# Altium PCB PCB_Decimal Display_2021-10-08.pcbdoc
Units mm, origin at the board's own origin, x right, y up, seen from the top; angles counter-clockwise.
Board outline 124.59 x 83.95 mm, 2 copper layers (Top Layer, Bottom Layer); 16 components, 42 nets, 109 pads, 14 vias.
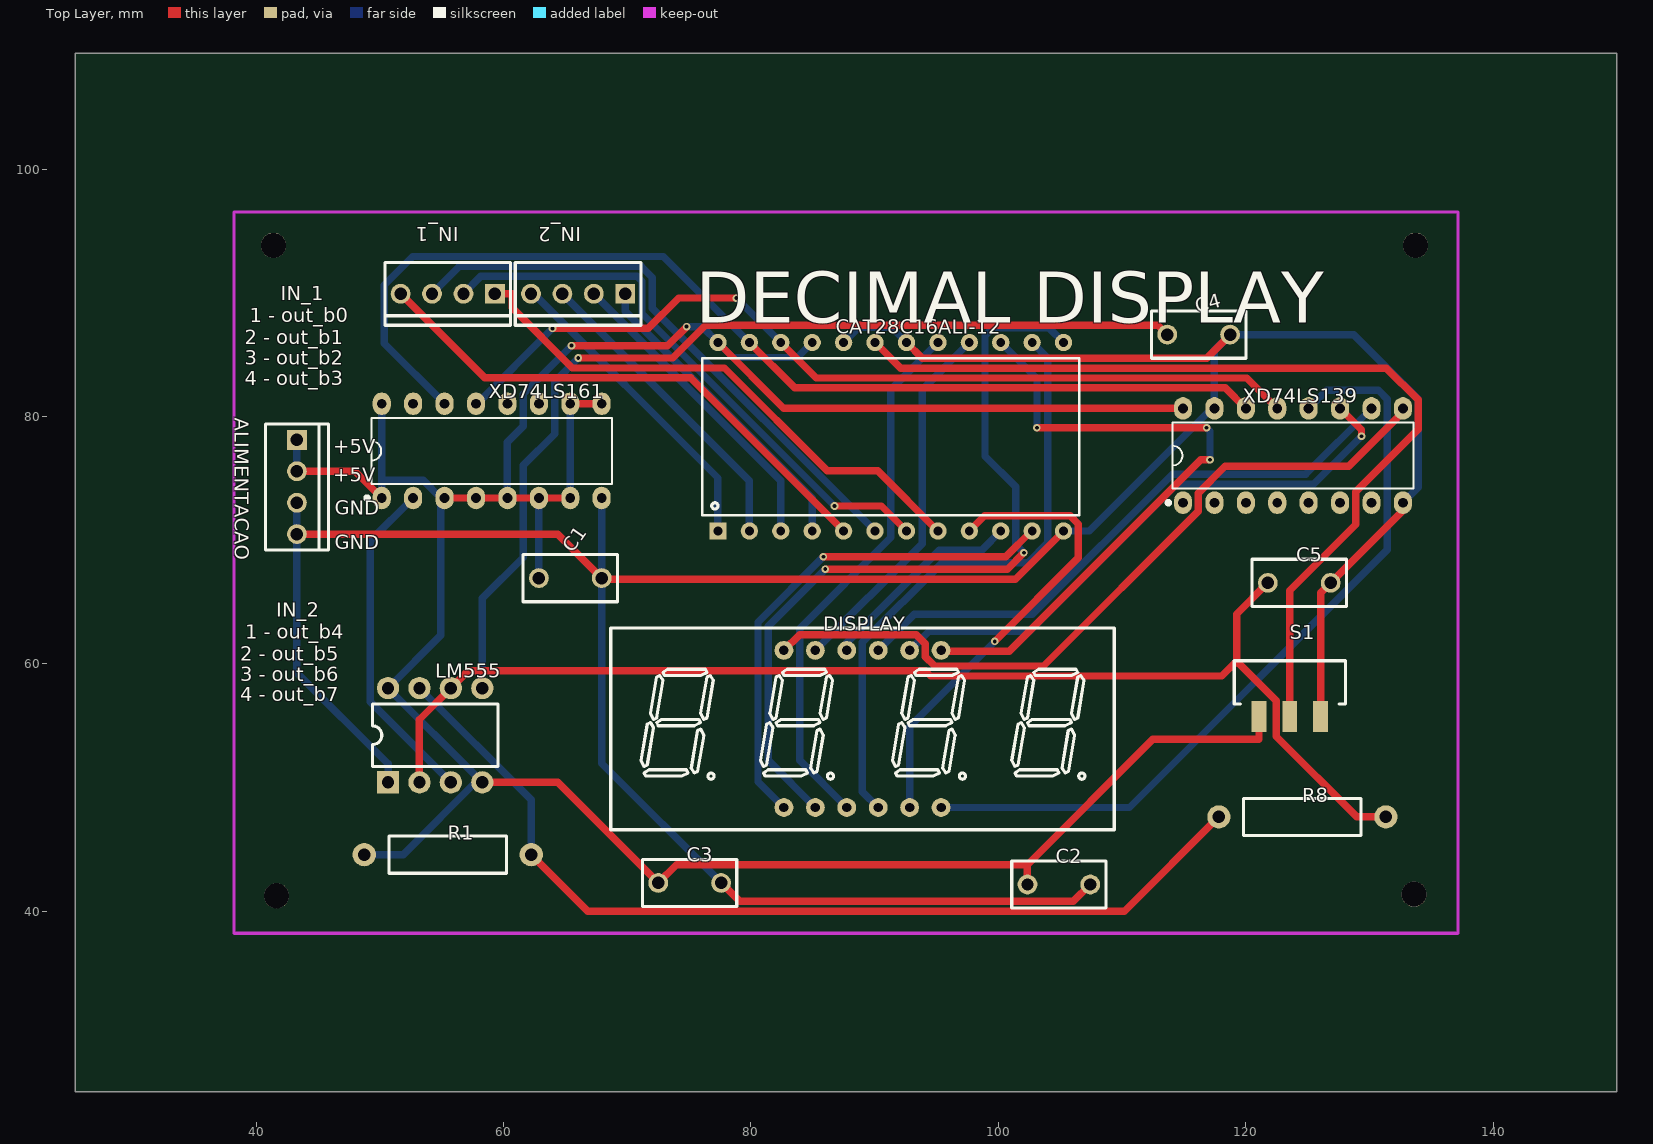
[diagram p0: Top Layer view]
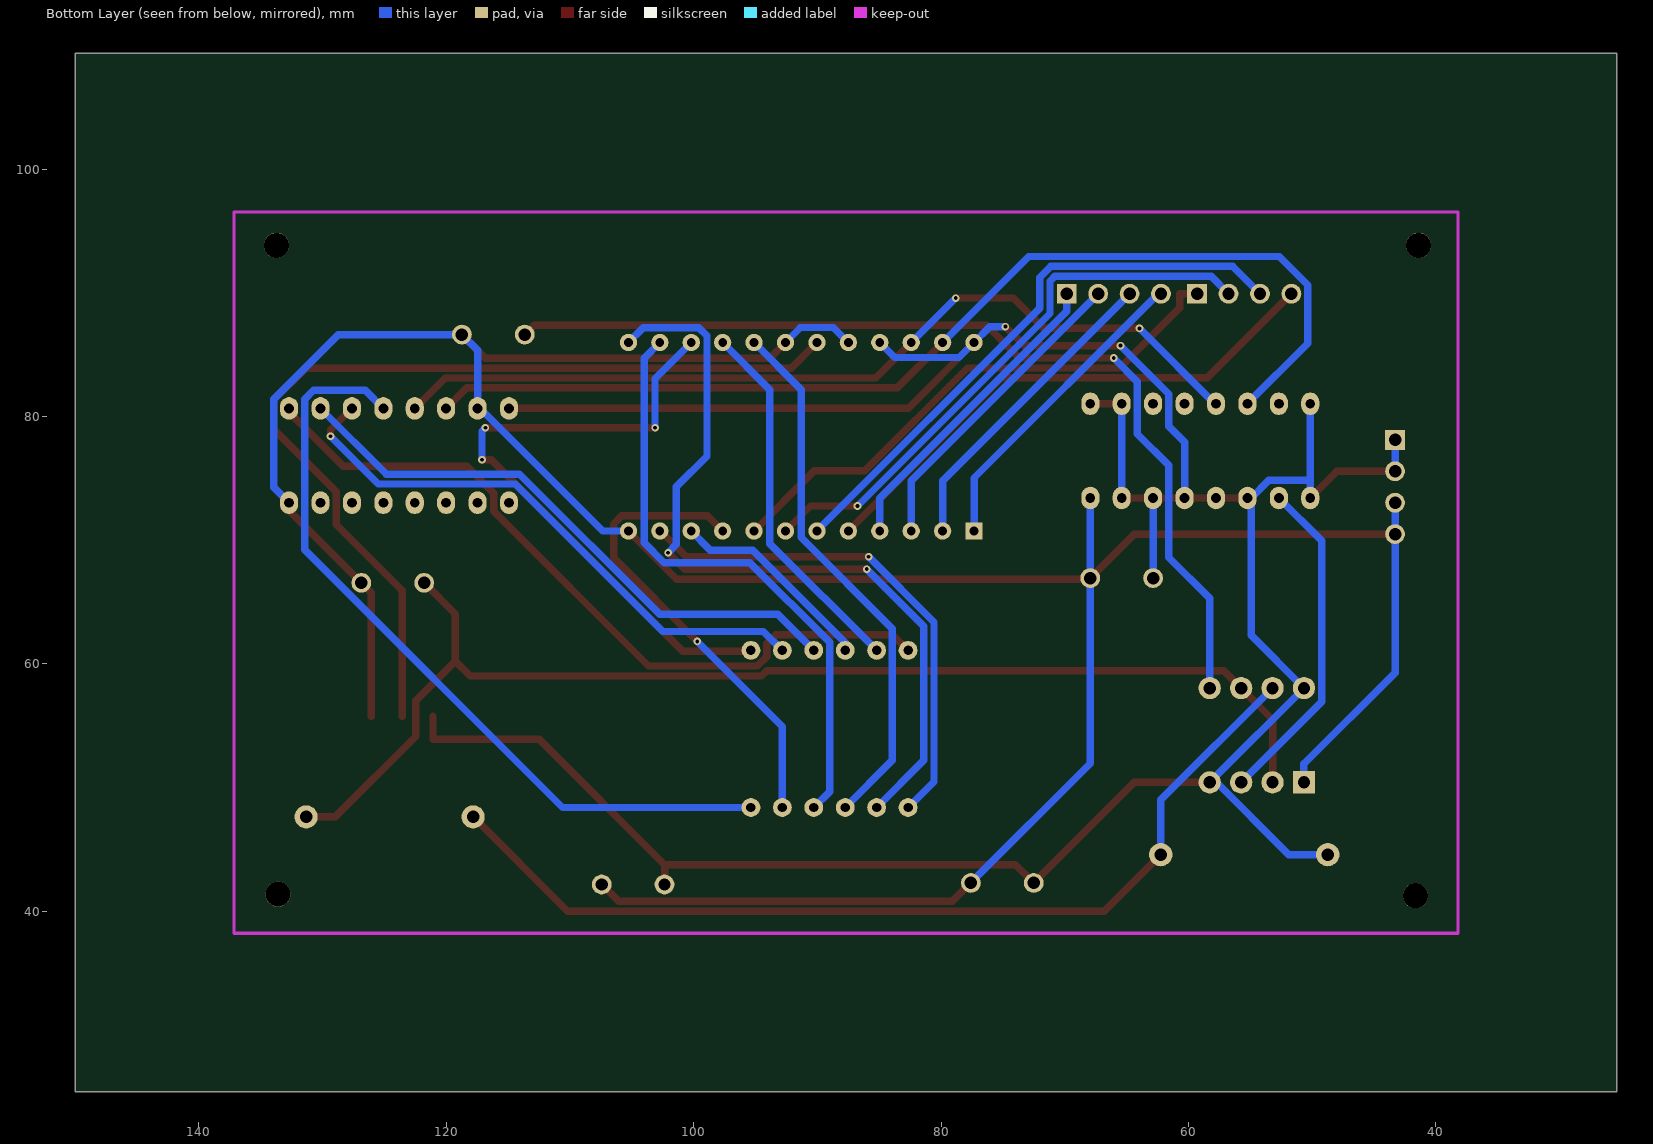
[diagram p1: Bottom Layer view, seen from below]

## Layer stack, top to bottom
Top Layer: signal copper (thickness not stored)
Dielectric: dielectric 0.32, FR-4, Dk 4.8
Bottom Layer: signal copper (thickness not stored)

## Board outline
149.987,25.4 25.4,25.4 25.4,109.347 149.987,109.347

## Components (designator, comment, footprint, x,y, rotation, side; value= is the part's Value field where it differs from the comment)
ALIMENTACAO "ALIM." HDR-TH_4P-P2.54-D1.0 43.307,74.295 r270 top
C1 "100nF 63V poli7" CAP-TH_L7.6-W3.8-P5.08-D0.51 65.405,66.929 r0 top
C2 "100nF 63V poli" CAP-TH_L7.6-W3.8-P5.08-D0.51 104.902,42.164 r0 top
C3 "100nF 63V poli" CAP-TH_L7.6-W3.8-P5.08-D0.51 75.057,42.291 r0 top
C4 "10nF 50V cera" CAP-TH_L7.6-W3.8-P5.08-D0.51 116.205,86.614 r0 top
C5 "15nF 63V poli" CAP-TH_L7.6-W3.8-P5.08-D0.51 124.333,66.548 r0 top
CAT28C16ALI-12 "CAT28C16ALI-12" DIP24-600 91.313,78.359 r0 top
DISPLAY "FJ4401BH" LED-SEG-TH_12P-L40.4-W16.0-P2.54-S12.70-BL 89.027,54.737 r0 top
IN_1 "OUT1" HDR-TH_4P-P2.54-D1.0 55.499,89.916 r180 top
IN_2 "OUT2" HDR-TH_4P-P2.54-D1.0 66.04,89.916 r180 top
LM555 "LM555CN" DIP-8_L9.7-W6.4-P2.54-LS7.6-BL 54.483,54.229 r0 top
R1 "1k" RES-TH_BD3.0-L9.5-P13.50-D0.6 55.499,44.577 r0 top
R8 "100k" RES-TH_BD3.0-L9.5-P13.50-D0.6 124.587,47.625 r0 top
S1 "SWITCH-SPDT" SWITCH-SPDT-SMD 123.571,55.753 r0 top
XD74LS139 "XD74LS139" DIP-16_L19.2-W6.6-P2.54-LS7.6-BL 123.825,76.835 r0 top
XD74LS161 "XD74LS161" DIP-16_L19.2-W6.6-P2.54-LS7.6-BL 59.055,77.216 r0 top

## Footprints (in the part's own frame and the unit in brackets; to place one, negate y for a bottom-side part, rotate by r counter-clockwise, add the part's x,y. Pads: shape width x height; smd on the part's side, far side on the other; paste and mask are expansions set on the pad)
CAP-TH_L7.6-W3.8-P5.08-D0.51 [mm]
  round 1.6 hole 1: 1(-2.54,0) 2(2.54,0)
  silkscreen extent -3.81,-1.91 3.81,1.91
DIP24-600 [mil]
  rect 55x55 hole 28: 1(-550,-300)
  round 55 hole 28: 2(-450,-300) 3(-350,-300) 4(-250,-300) 5(-150,-300) 6(-50,-300) 7(50,-300) 8(150,-300) 9(250,-300) 10(350,-300) 11(450,-300) 12(550,-300) 13(550,300) 14(450,300) 15(350,300) 16(250,300) 17(150,300) 18(50,300) 19(-50,300) 20(-150,300) 21(-250,300) 22(-350,300) 23(-450,300) 24(-550,300)
  silkscreen extent -600,-250 600,250
DIP-8_L9.7-W6.4-P2.54-LS7.6-BL [mm]
  rect 1.8x1.8 hole 1: 1(-3.81,-3.81)
  round 1.8 hole 1: 2(-1.27,-3.81) 3(1.27,-3.81) 4(3.81,-3.81) 5(3.81,3.81) 6(1.27,3.81) 7(-1.27,3.81) 8(-3.81,3.81)
  silkscreen extent -5.08,-2.53 5.08,2.53
DIP-16_L19.2-W6.6-P2.54-LS7.6-BL [mm]
  oval 1.46x1.825 hole 0.8: 1(-8.89,-3.81) 2(-6.35,-3.81) 3(-3.81,-3.81) 4(-1.27,-3.81) 5(1.27,-3.81) 6(3.81,-3.81) 7(6.35,-3.81) 8(8.89,-3.81) 9(8.89,3.81) 10(6.35,3.81) 11(3.81,3.81) 12(1.27,3.81) 13(-1.27,3.81) 14(-3.81,3.81) 15(-6.35,3.81) 16(-8.89,3.81)
  silkscreen extent -10.22,-3.96 9.73,2.67
HDR-TH_4P-P2.54-D1.0 [mm]
  rect 1.6x1.6 hole 1: 1(-3.81,0)
  round 1.6 hole 1: 2(-1.27,0) 3(1.27,0) 4(3.81,0)
  silkscreen extent -5.08,-2.54 5.08,2.54
LED-SEG-TH_12P-L40.4-W16.0-P2.54-S12.70-BL [mil]
  round 60 hole 30: 1(-250,-250) 2(-150,-250) 3(-50,-250) 4(50,-250) 5(150,-250) 6(250,-250) 7(250,250) 8(150,250) 9(50,250) 10(-50,250) 11(-150,250) 12(-250,250)
  silkscreen extent -801,-321 801,321
RES-TH_BD3.0-L9.5-P13.50-D0.6 [mm]
  round 1.88 hole 1: 1(-6.75,0) 2(6.75,0)
  silkscreen extent -4.75,-1.5 4.75,1.5
SWITCH-SPDT-SMD [mil]
  rect 47.2x98.4 smd: 1(-98,0) 2(0,0) 3(98,0)
  silkscreen extent -177,39 177,177

## Free pads (board coordinates)
  round 2.032 hole 2.032 unplated: ""(41.408,93.831) ""(41.662,41.253) ""(133.61,41.38) ""(133.737,93.831)

## Via types
v1: diameter 0.61, hole 0.305, Top Layer to Bottom Layer, 14 vias

## Nets (pads, with @x,y where several pads share a name; then routed paths per layer and width w, separated by ;. In a path a pad name is that pad's centre, name@x,y a point inside that pad or via, vN(x,y) a via of type N, cw(c..) or ccw(c..) an arc to the next point about the centre after c; other vN are vias at no path point)
+5V: ALIMENTACAO.1 ALIMENTACAO.2 C1.1 C2.1 C3.1 CAT28C16ALI-12.21 CAT28C16ALI-12.24 LM555.4 LM555.8 R1.1 S1.1 XD74LS139.16 XD74LS161.1 XD74LS161.3 XD74LS161.4 XD74LS161.5 XD74LS161.6 XD74LS161.7 XD74LS161.9 XD74LS161.10 XD74LS161.16 | length 240.4
  Top Layer w0.6: ALIMENTACAO.2 48.006,75.565 XD74LS161.1 ; XD74LS161.3 XD74LS161.4 XD74LS161.5 XD74LS161.6 XD74LS161.7 ; LM555.4 64.389,50.419 C3.1 73.989,43.763 102.362,43.763 ; XD74LS161.10 XD74LS161.9 ; v1(65.503,85.724) 73.267,85.724 v1(74.808,87.264) ; CAT28C16ALI-12.24 82.677,80.645 XD74LS139.16 ; C2.1 102.362,43.763 ; S1.1 121.082,53.902 112.501,53.902 102.362,43.763
  Bottom Layer w0.6: ALIMENTACAO.2 ALIMENTACAO.1 ; R1.1@48.749,44.577 51.895,44.577 LM555.4@58.012,50.694 ; XD74LS161.1 50.165,74.835 ; XD74LS161.16 50.165,74.835 ; XD74LS161.3 XD74LS161.3@54.949,73.406 ; LM555.4 58.018,50.694 LM555.4@58.012,50.694 ; XD74LS161.5 60.325,77.923 61.595,79.193 61.595,81.815 v1(65.503,85.724) ; C1.1 XD74LS161.6 ; XD74LS161.7 XD74LS161.10 ; v1(74.808,87.264) 76.058,87.264 CAT28C16ALI-12.24 78.559,84.763 83.747,84.763 CAT28C16ALI-12.21 ; 50.165,74.835 53.521,74.835 XD74LS161.3@54.949,73.406 ; XD74LS161.3@54.949,73.406 54.949,62.315 LM555.8 58.012,50.7 LM555.4@58.012,50.694
GND: ALIMENTACAO.3 ALIMENTACAO.4 C1.2 C2.2 C3.2 C4.2 C5.2 CAT28C16ALI-12.12 CAT28C16ALI-12.18 CAT28C16ALI-12.20 LM555.1 S1.3 XD74LS139.8 XD74LS139.15 XD74LS161.8 | length 259.5
  Top Layer w0.6: ALIMENTACAO.4 64.389,70.485 C1.2 68.021,66.853 101.397,66.853 CAT28C16ALI-12.12 ; C3.2 79.092,40.796 106.074,40.796 C2.2 ; CAT28C16ALI-12.18 93.849,84.713 116.844,84.713 C4.2 ; S1.3 126.06,65.735 C5.2 132.715,72.39 XD74LS139.8
  Bottom Layer w0.6: ALIMENTACAO.3 ALIMENTACAO.4 43.307,59.286 50.673,51.92 LM555.1 ; XD74LS161.8 C1.2 67.945,51.943 C3.2 ; CAT28C16ALI-12.20 88.711,87.187 91.375,87.187 CAT28C16ALI-12.18 ; CAT28C16ALI-12.12 107.347,70.739 117.253,80.645 XD74LS139.15 117.475,85.344 C4.2 128.749,86.614 133.966,81.397 133.966,74.276 XD74LS139.8
LED1_6: DISPLAY.6 XD74LS139.12 | length 64.1
  Bottom Layer w0.6: DISPLAY.6 110.613,48.387 131.445,69.219 131.445,81.402 130.741,82.105 126.555,82.105 XD74LS139.12
LED1_8: DISPLAY.8 XD74LS139.11 | length 46.7
  Top Layer w0.6: XD74LS139.11 129.366,78.914 v1(129.366,78.407)
  Bottom Layer w0.6: DISPLAY.8 94.367,62.617 102.502,62.617 114.425,74.54 125.499,74.54 v1(129.366,78.407)
LED1_9: DISPLAY.9 XD74LS139.10 | length 48
  Bottom Layer w0.6: DISPLAY.9 93.217,64.007 102.757,64.007 114.092,75.343 124.873,75.343 XD74LS139.10
LED1_12: DISPLAY.12 XD74LS139.9 | length 61.9
  Top Layer w0.6: DISPLAY.12 83.941,62.351 93.373,62.351 94.113,61.611 94.113,60.564 94.854,59.823 103.658,59.823 116.167,72.332 116.167,73.803 118.335,75.971 128.336,75.971 132.715,80.351 XD74LS139.9
S$31: 
S$33: 
S$35: 
U1_1: CAT28C16ALI-12.1 IN_2.4 | length 25.6
  Bottom Layer w0.6: IN_2.4 62.453,89.916 77.343,75.026 CAT28C16ALI-12.1
U1_2: CAT28C16ALI-12.2 IN_2.3 | length 25.4
  Bottom Layer w0.6: IN_2.3 79.883,74.803 CAT28C16ALI-12.2
U1_3: CAT28C16ALI-12.3 IN_2.2 | length 25.4
  Bottom Layer w0.6: IN_2.2 82.423,74.803 CAT28C16ALI-12.3
U1_4: CAT28C16ALI-12.4 IN_2.1 | length 25.4
  Bottom Layer w0.6: IN_2.1 69.85,88.514 84.963,73.401 CAT28C16ALI-12.4
U1_5: CAT28C16ALI-12.5 IN_1.4 | length 43.8
  Top Layer w0.6: IN_1.4 58.49,83.115 75.127,83.115 CAT28C16ALI-12.5
U1_6: CAT28C16ALI-12.6 IN_1.3 | length 47
  Bottom Layer w0.6: IN_1.3 56.438,92.125 71.143,92.125 72.033,91.235 72.033,88.749 CAT28C16ALI-12.6
U1_7: CAT28C16ALI-12.7 IN_1.2 | length 46.5
  Top Layer w0.6: v1(86.762,72.761) 90.561,72.761 CAT28C16ALI-12.7
  Bottom Layer w0.6: IN_1.2 58.175,91.322 70.811,91.322 71.2,90.933 71.2,88.324 v1(86.762,72.761)
U1_8: CAT28C16ALI-12.8 IN_1.1 | length 44.4
  Top Layer w0.6: IN_1.1 60.711,89.916 60.711,88.778 65.571,83.918 77.869,83.918 86.18,75.607 90.255,75.607 CAT28C16ALI-12.8
U1_9: CAT28C16ALI-12.9 DISPLAY.5 | length 38.2
  Top Layer w0.6: CAT28C16ALI-12.9 98.893,71.969 105.82,71.969 106.484,71.306 106.484,68.584 v1(99.71,61.81)
  Bottom Layer w0.6: DISPLAY.5 92.837,54.937 v1(99.71,61.81)
U1_10: CAT28C16ALI-12.10 DISPLAY.10 | length 16.8
  Bottom Layer w0.6: DISPLAY.10 87.757,61.706 95.241,69.19 98.654,69.19 CAT28C16ALI-12.10
U1_11: CAT28C16ALI-12.11 DISPLAY.1 | length 41.1
  Top Layer w0.6: v1(85.864,68.651) 100.599,68.651 102.687,70.739 CAT28C16ALI-12.11
  Bottom Layer w0.6: DISPLAY.1 80.58,50.484 80.58,63.367 v1(85.864,68.651)
U1_13: CAT28C16ALI-12.13 DISPLAY.2 | length 65.3
  Top Layer w0.6: v1(86.014,67.66) 100.75,67.66 v1(102.073,68.984)
  Bottom Layer w0.6: DISPLAY.2 81.398,52.206 81.398,63.044 v1(86.014,67.66) ; v1(102.073,68.984) 101.404,69.653 101.404,74.304 98.933,76.775 98.933,86.508 99.605,87.18 104.082,87.18 CAT28C16ALI-12.13
U1_14: CAT28C16ALI-12.14 DISPLAY.4 | length 48.9
  Bottom Layer w0.6: DISPLAY.4 89.021,49.663 89.021,61.737 95.46,68.176 102.407,68.176 104.013,69.782 104.013,84.709 CAT28C16ALI-12.14
U1_15: CAT28C16ALI-12.15 DISPLAY.7 | length 52.7
  Top Layer w0.6: DISPLAY.7 95.461,61.003 100.886,61.003 116.386,76.503 v1(117.117,76.503) ; v1(103.131,79.092) v1(116.841,79.092)
  Bottom Layer w0.6: CAT28C16ALI-12.15 103.131,83.051 v1(103.131,79.092) ; v1(116.841,79.092) 117.117,78.816 v1(117.117,76.503)
U1_16: CAT28C16ALI-12.16 DISPLAY.11 | length 30
  Bottom Layer w0.6: DISPLAY.11 93.853,69.723 93.853,82.169 CAT28C16ALI-12.16
U1_17: CAT28C16ALI-12.17 DISPLAY.3 | length 43.8
  Bottom Layer w0.6: DISPLAY.3 83.947,52.197 83.947,62.85 91.313,70.216 91.313,82.169 CAT28C16ALI-12.17
U1_19: CAT28C16ALI-12.19 S1.2 | length 75.7
  Top Layer w0.6: CAT28C16ALI-12.19 92.112,83.91 131.375,83.91 133.949,81.337 133.949,78.949 128.905,73.905 128.905,71.266 123.571,65.932 S1.2
U2_2: C5.1 LM555.2 LM555.6 R8.2 | length 99.8
  Top Layer w0.6: LM555.2 53.213,55.499 LM555.6 57.169,59.455 94.087,59.455 94.521,59.02 118.068,59.02 119.272,60.224 ; C5.1 119.272,64.027 119.272,60.224 ; R8.2@131.337,47.625 128.973,47.625 122.469,54.129 122.469,57.027 119.272,60.224
U2_3: LM555.3 XD74LS161.2 | length 27.1
  Bottom Layer w0.6: XD74LS161.2 49.244,69.945 49.244,56.928 LM555.3
U2_5: C4.1 LM555.5 | length 78.9
  Top Layer w0.6: v1(66.055,84.725) 73.697,84.725 76.336,87.364 112.915,87.364 C4.1
  Bottom Layer w0.6: LM555.5 58.293,65.292 61.595,68.594 61.595,76.043 64.135,78.583 64.135,82.805 v1(66.055,84.725)
U2_7: LM555.7 R1.2 R8.1 | length 77.9
  Top Layer w0.6: R1.2@62.249,44.577 66.833,39.993 110.205,39.993 R8.1@117.837,47.625
  Bottom Layer w0.6: LM555.7 62.249,49.003 R1.2@62.249,44.577
U3_11: XD74LS161.11
U3_12: XD74LS161.12
U3_13: CAT28C16ALI-12.22 XD74LS139.13 XD74LS161.13 | length 72
  Top Layer w0.6: v1(63.967,87.116) 71.702,87.116 74.158,89.572 v1(78.83,89.572) ; CAT28C16ALI-12.22 85.295,83.107 120.093,83.107 XD74LS139.13
  Bottom Layer w0.6: XD74LS161.13 57.877,81.026 v1(63.967,87.116) ; v1(78.83,89.572) CAT28C16ALI-12.22
U3_14: CAT28C16ALI-12.23 XD74LS139.14 XD74LS161.14 | length 87.3
  Top Layer w0.6: CAT28C16ALI-12.23 83.558,82.304 118.356,82.304 XD74LS139.14
  Bottom Layer w0.6: XD74LS161.14 50.376,85.895 50.376,90.623 52.681,92.928 72.934,92.928 CAT28C16ALI-12.23
U3_15: XD74LS161.15
U4_1: XD74LS139.1
U4_2: XD74LS139.2
U4_3: XD74LS139.3
U4_4: XD74LS139.4
U4_5: XD74LS139.5
U4_6: XD74LS139.6
U4_7: XD74LS139.7

## Silkscreen, mask and mechanical layers (free items; w line width, h text height)
Top Overlay:
  text "IN_1" at 42.017,89.385 h1.14
  text "1 - out_b0" at 39.477,87.607 h1.14
  text "DECIMAL DISPLAY" at 75.565,87.591 h4.14
  text "2 - out_b1" at 39.096,85.829 h1.14
  text "3 - out_b2" at 39.096,84.178 h1.14
  text "4 - out_b3" at 39.096,82.527 h1.14
  text "+5V" at 46.228,77.025 h1.14
  text "+5V" at 46.228,74.739 h1.14
  text "GND" at 46.355,72.072 h1.14
  text "GND" at 46.355,69.278 h1.14
  text "IN_2" at 41.656,63.817 h1.14
  text "1 - out_b4" at 39.116,62.039 h1.14
  text "2 - out_b5" at 38.735,60.261 h1.14
  text "3 - out_b6" at 38.735,58.61 h1.14
  text "4 - out_b7" at 38.735,56.959 h1.14